# Altium PCB MODULATOR.PcbDoc
Units mm, origin at the board's own origin, x right, y up, seen from the top; angles counter-clockwise.
Board outline 79.6 x 48.2 mm, 2 copper layers (Top Layer, Bottom Layer), stack 1.7 mm thick; 53 components, 27 nets, 145 pads, 189 vias.
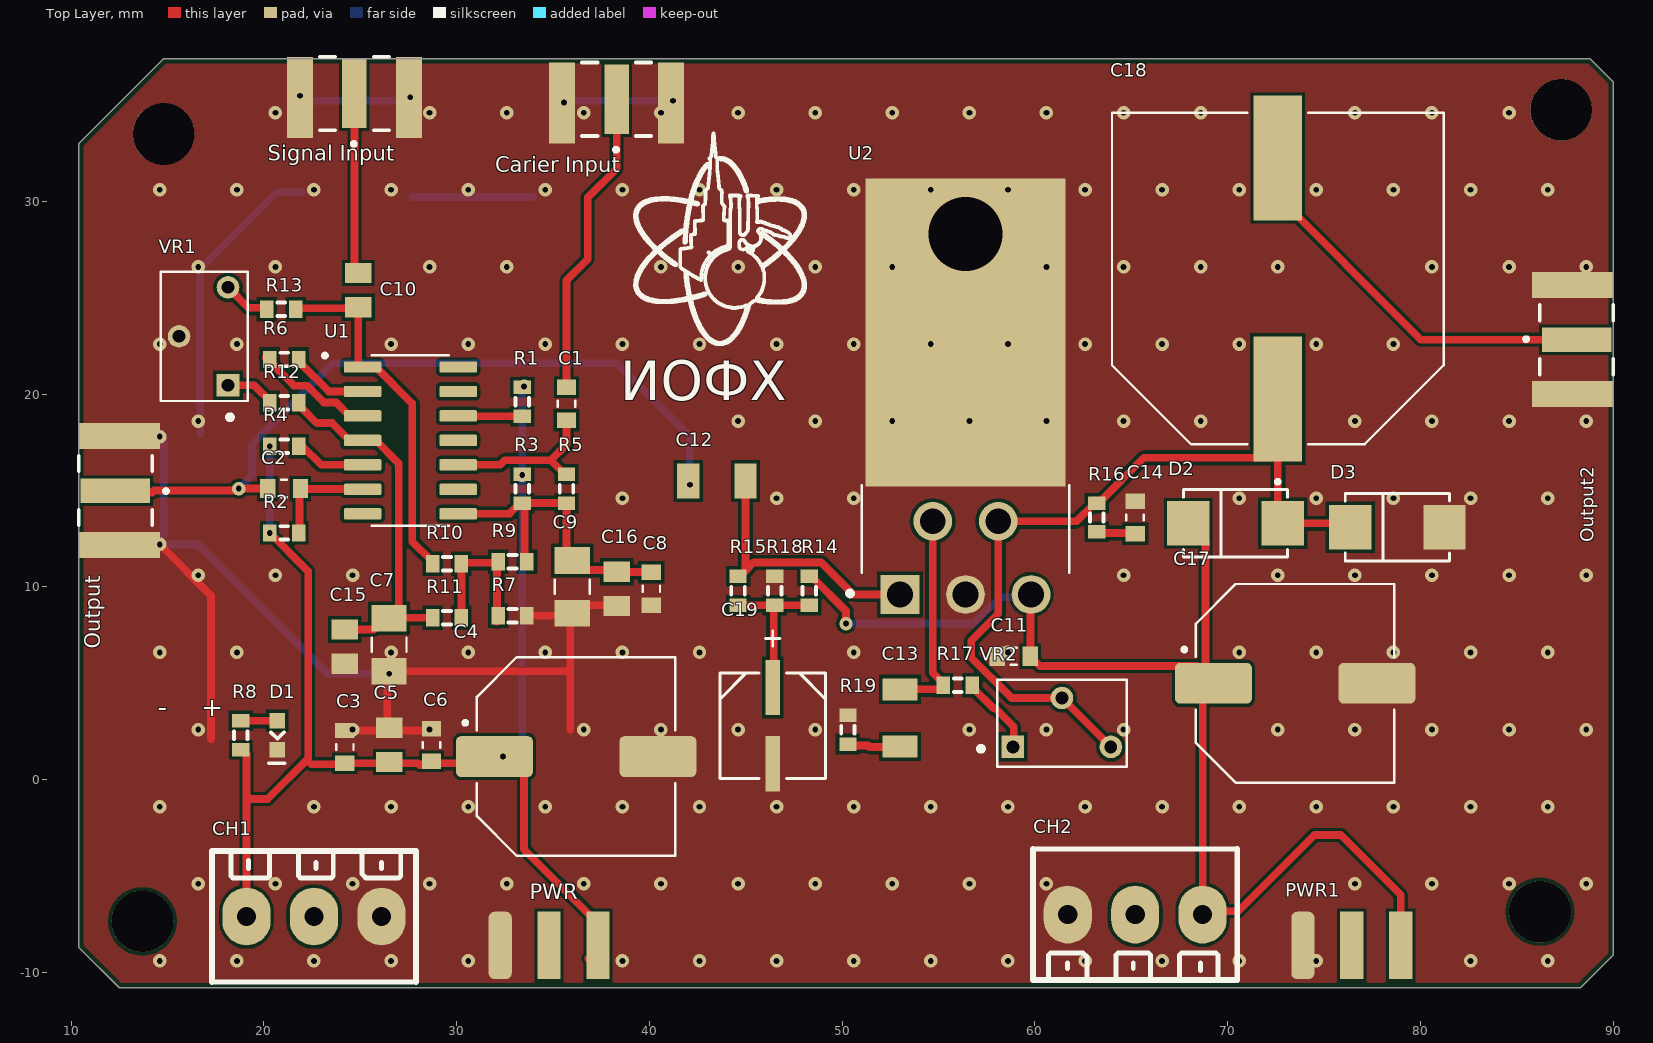
[diagram p0: Top Layer view]
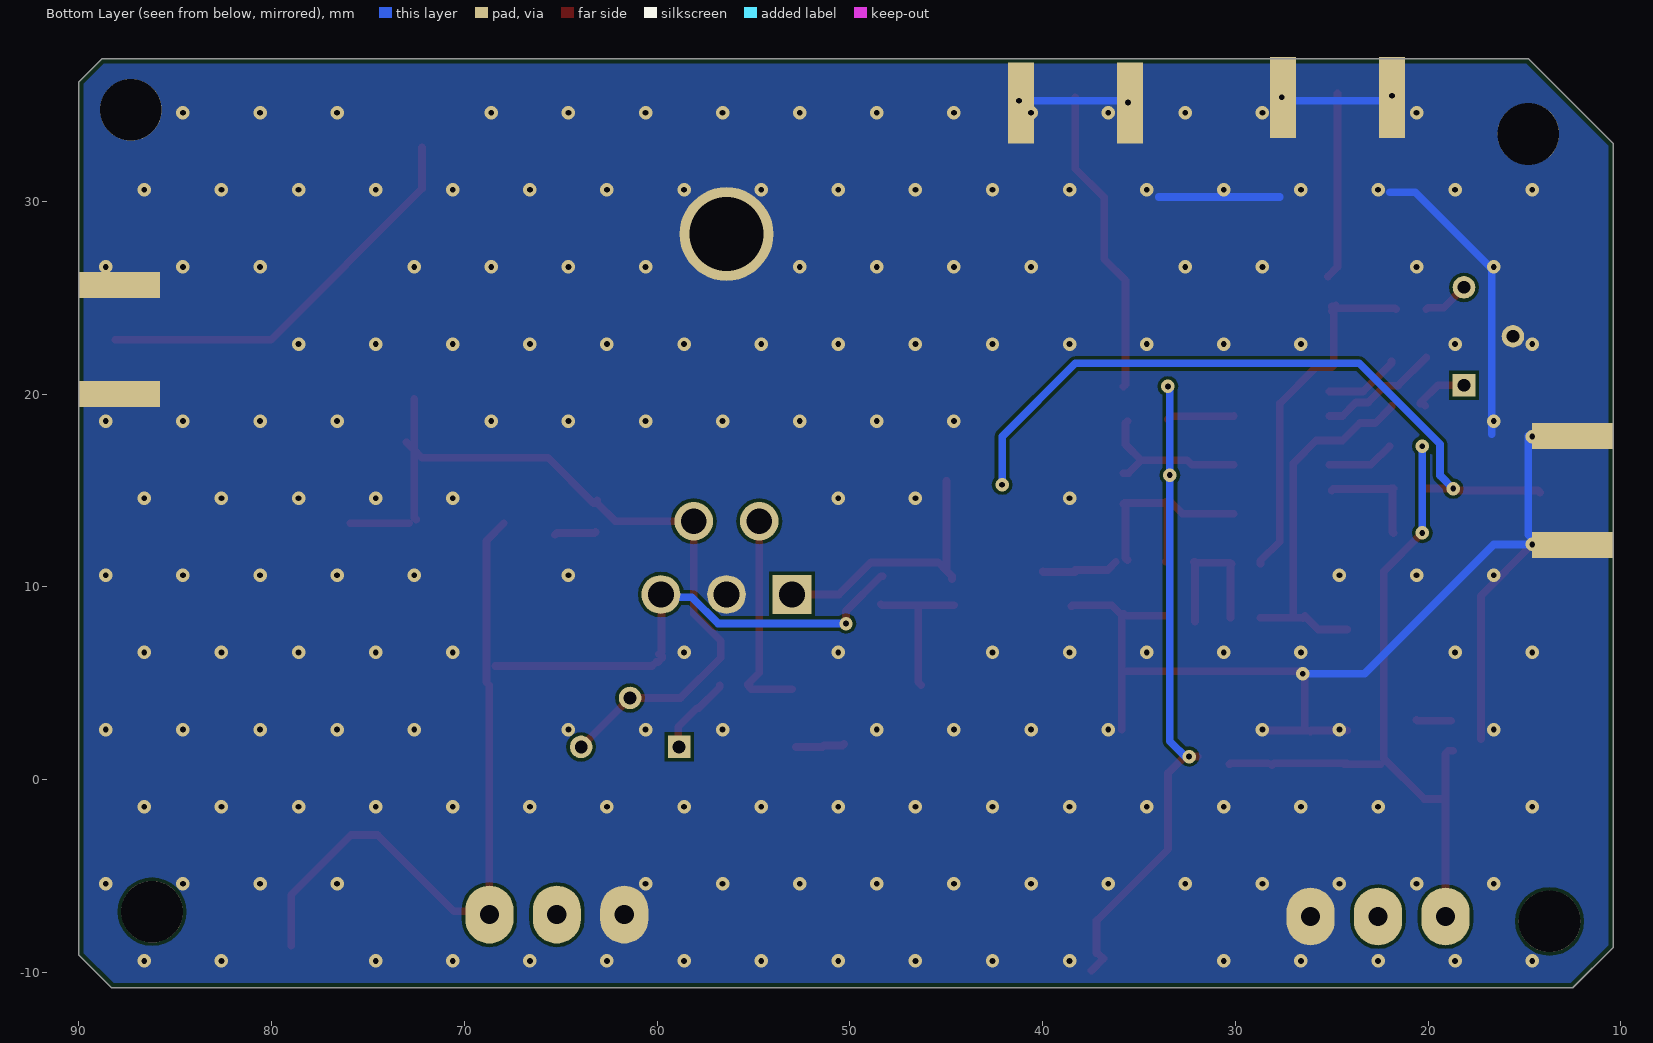
[diagram p1: Bottom Layer view, seen from below]
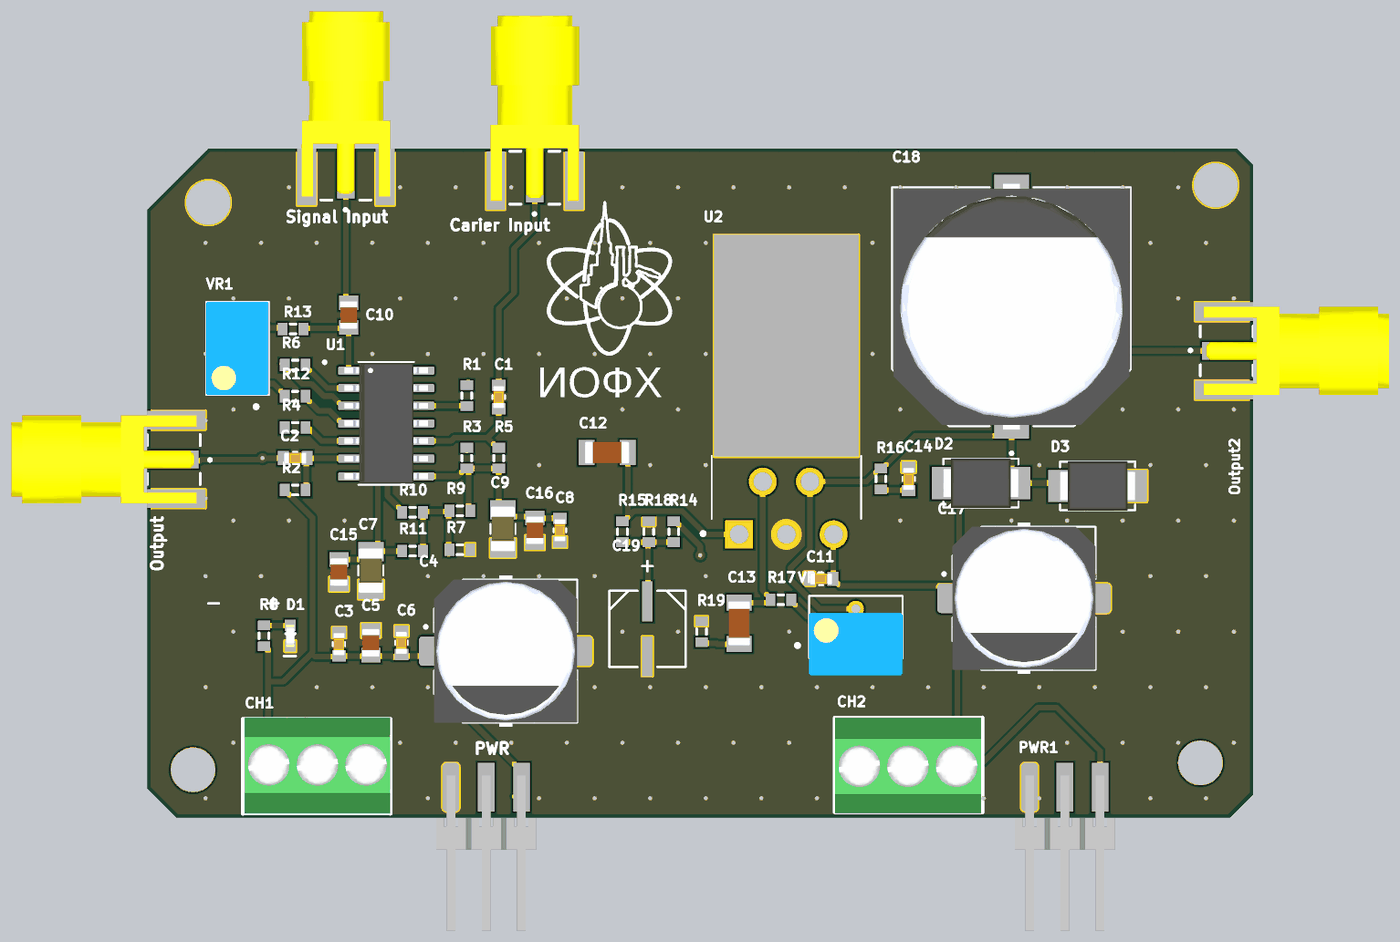
[diagram p2: 3D render of the assembled board from above, using the file's embedded part models]

## Layer stack, top to bottom
Top Solder: solder mask 0.0102, Solder Resist, Dk 3.5
Top Layer: signal copper 0.05
Dielectric 1: dielectric 1.6, FR-4, Dk 4.8
Bottom Layer: signal copper 0.05
Bottom Solder: solder mask 0.0102, Solder Resist, Dk 3.5

## Board outline
10.4,-8.7 12.5,-10.8 88.3,-10.8 90,-9.1 90,36.2 88.8,37.4 14.8,37.4 10.4,33

## Design rules (kind name [scope] priority, off if disabled: settings)
BoardOutlineClearance [All] p1: gap=0.25 ignorepadtopadclearanceinfootprint=FALSE
Clearance [All] p1: gap=0.17 ignorepadtopadclearanceinfootprint=FALSE
ComponentClearance [All] p1: gap=0.254 collisioncheckmode=3 verticalgap=2540 showdistances=FALSE
FanoutControl Fanout_SOIC [IsSOIC] p3: bgadir=Out bgaviamode=Closest fanoutstyle=Auto fanoutdirection=Alternating viagrid=0.025 // Fanout_SOIC (Default Rule)
FanoutControl Fanout_Small [(CompPinCount < 5)] p4: bgadir=Out bgaviamode=Closest fanoutstyle=Auto fanoutdirection=OutThenIn viagrid=0.025 // Fanout_Small (Default Rule)
FanoutControl Fanout_Default [All] p5: bgadir=In bgaviamode=Closest fanoutstyle=Auto fanoutdirection=Alternating viagrid=0.025 // Fanout_Default (Default Rule)
HoleSize [All] p1: absolutevalues=TRUE maxlimit=4.5 minlimit=0.3 maxpercent=80.000 minpercent=20.000
HoleToHoleClearance [All] p1: gap=0.4 allowstackedmicrovias=TRUE
MinimumSolderMaskSliver [All] p1: minsoldermaskwidth=0.15
PlaneClearance [All] p1: clearance=0.2
PlaneConnect [All] p1: planeconnectstyle=Relief reliefexpansion=0.5 reliefentries=4 reliefconductorwidth=0.2 reliefairgap=0.25
PolygonConnect PolygonConnect_1 [InNet('GND')] p1: connectstyle=Direct reliefconductorwidth=0.254 reliefentries=4 polygonreliefangle="90 Angle" airgapwidth=0.254
PolygonConnect [All] p2: connectstyle=Relief reliefconductorwidth=0.3 reliefentries=4 polygonreliefangle="90 Angle" airgapwidth=0.16
RoutingCorners [All] p1: cornerstyle=45-Degree minsetback=2.5 maxsetback=2.5
RoutingPriority [All] p1 off: routingpriority=0
RoutingVias [All] p1: holewidth=0.3 width=0.7 viastyle="Through Hole" minholewidth=0.3 minwidth=0.7 maxholewidth=0.8 maxwidth=1.2
SilkToSilkClearance [All] p1: silktosilkclearance=0
SilkToSolderMaskClearance [IsPad] p1: minsilkscreentomaskgap=0 clearancetoexposedcopper=TRUE
SolderMaskExpansion [All] p1: expansion=0.1 istentingtop=FALSE
Width [All] p1: maxlimit=5 minlimit=0.17 preferedwidth=0.3
17 further rules are at their usual default settings.

## Components (designator, comment, footprint, x,y, rotation, side; value= is the part's Value field where it differs from the comment)
C1 "GX035C104MAT2-500" *CAPC1608X90 35.7,19.5 r270 top value=0.1u
C2 "GX035C104MAT2-500" *CAPC1608X90 21.05,15.1 r180 top value=0.1u
C3 "GX035C104MAT2-500" *CAPC1608X90 24.2,1.7 r90 top value=0.1u
C4 "UWT1H221MNL1GS" CAPAE1030X1080N_UWT1H221MNL1GS 36.2,1.2 r0 top
C5 "GRM21BR61C106KE15K" CAPC2012X135N 26.5,1.8 r270 top value="10u 16V"
C6 "GX035C104MAT2-500" *CAPC1608X90 28.7,1.8 r90 top value=0.1u
C7 "GRM31CR61A476KE15L" *CAPC3216X125N 26.5,7 r90 top value=15u
C8 "GX035C104MAT2-500" *CAPC1608X90 40.1,9.9 r270 top value=0.1u
C9 "GRM31CR61A476KE15L" *CAPC3216X125N 36,10 r90 top value=15u
C10 "GRM21BR61C106KE15K" CAPC2012X135N 24.9,25.4 r270 top value="10u 16V"
C11 "GX035C104MAT2-500" *CAPC1608X90 58.9,6.4 r0 top value=0.1u
C12 "GRM31CR71H225KA88L" *CAP3216X125N 43.5,15.5 r0 top value=2.2u
C13 "GRM31CR71H225KA88L" *CAP3216X125N 53,3.2 r90 top value=2.2u
C14 "GX035C104MAT2-500" *CAPC1608X90 65.2,13.6 r270 top value=0.1u
C15 "GRM21BR61C106KE15K" CAPC2012X135N 24.2,6.9 r90 top value="10u 16V"
C16 "GRM21BR61C106KE15K" CAPC2012X135N 38.3,9.9 r90 top value="10u 16V"
C17 "UWT1H221MNL1GS" CAPAE1030X1080N_UWT1H221MNL1GS 73.5,5 r0 top
C18 "EEE-FK1E272SM" CAP_EEE-FK1E272SM 72.6,26 r90 top
C19 "EEE-FK1E330UR" SM_RADIAL_C 46.4,2.8 r270 top
"Carier Input" "SMA-J-P-H-ST-EM1" SAMTEC_SMA-J-P-H-ST-EM1 38.3,35.3 r180 top
CH1 "LHWR" KF350-3p 16,-1.5 r180 top
CH2 "LHWR" KF350-3p 71.8,-12.6 r0 top
D1 "0603-LED-BLUE" *LEDM1608X80_LTE-C1906R-14(Primary) 20.7,2.3 r90 top
D2 "SK56" *SMB_P6SMB62AT3G(Primary) 70.4,13.3 r180 top
D3 "SK56" *SMB_P6SMB62AT3G(Primary) 78.8,13.1 r180 top
Output "SMA-J-P-H-ST-EM1" SAMTEC_SMA-J-P-H-ST-EM1 12.3,15 r270 top
Output2 "SMA-J-P-H-ST-EM1" SAMTEC_SMA-J-P-H-ST-EM1 88.1,22.825 r90 top
PWR "A" "HDR Side 3 pin" 34.8,-8.6 r0 top
PWR1 "A" "HDR Side 3 pin" 76.44,-8.6 r0 top
R1 "Res3" J1-0603 33.4,19.6 r90 top value=3k
R2 "Res3" J1-0603 21.05,12.8 r180 top value=3k
R3 "Res3" J1-0603 33.4,15.1 r90 top value=1.3k
R4 "RC0603FR-0710KL" J1-0603 21.05,17.3 r0 top value=10k
R5 "Res3" J1-0603 35.7,15.1 r270 top value=51
R6 "Res3" J1-0603 21.05,21.8 r0 top value=1k
R7 "Res3" J1-0603 32.9,8.5 r180 top value=1k
R8 "Res3" J1-0603 18.8,2.3 r90 top value=330
R9 "Res3" J1-0603 32.9,11.3 r0 top value=820
R10 "Res3" J1-0603 29.5,11.2 r180 top value=100
R11 "Res3" J1-0603 29.5,8.4 r180 top value=100
R12 "RC0603FR-0710KL" J1-0603 21.05,19.55 r180 top value=10k
R13 "RC0603FR-0710KL" J1-0603 20.9,24.4 r180 top value=10k
R14 "RC0603FR-0710KL" J1-0603 48.3,9.8 r270 top value=100k
R15 "RC0603FR-0710KL" J1-0603 44.6,9.8 r270 top value=100k
R16 "RC0603FR-0710KL" J1-0603 63.2,13.6 r90 top value=1
R17 "RC0603FR-0710KL" J1-0603 56,4.9 r0 top value=50к
R18 "RC0603FR-0710KL" J1-0603 46.5,9.8 r90 top value=100k
R19 "RC0603FR-0710KL" J1-0603 50.3,2.6 r90 top value=4.7k
"Signal Input" "SMA-J-P-H-ST-EM1" SAMTEC_SMA-J-P-H-ST-EM1 24.7,35.6 r180 top
U1 "MC1496DR2G" SOIC127P600X175-14N 27.6,17.6 r0 top
U2 "TDA2030" TO170P1580X1040X480-5 53,9.607 r0 top
VR1 "3266W-1-503LF" TRIM_3266W-1-503LF 18.14,23 r90 top
VR2 "3266W-1-503LF" TRIM_3266W-1-503LF 61.4,1.7 r0 top

## Footprints (in the part's own frame and the unit in brackets; to place one, negate y for a bottom-side part, rotate by r counter-clockwise, add the part's x,y. Pads: shape width x height; smd on the part's side, far side on the other; paste and mask are expansions set on the pad)
*CAP3216X125N [mm]
  rect 1.15x1.82 smd: 1(-1.485,0) 2(1.485,0)
  body extent -1.6,-0.8 1.6,0.8, height 1.22
*CAPC1608X90 [mm]
  rect 0.8x1 smd: 1(-0.85,0) 2(0.85,0)
  silkscreen extent -0.15,-0.45 0.15,0.45, body extent -0.8,-0.4 0.8,0.41, height 0.88
*CAPC3216X125N [mm]
  rect 1.38x1.82 smd: 1(-1.369,0) 2(1.369,0)
  silkscreen extent -0.36,-0.9 0.36,0.9, body extent -1.6,-0.87 1.6,0.87, height 1.71
*LEDM1608X80_LTE-C1906R-14(Primary) [mm]
  rect 0.8x0.8 smd: A(0.75,0) C(-0.75,0)
  silkscreen extent -1.45,-0.38 0.16,0.45, body extent -0.8,-0.3 0.8,0.3, height 1.15
*SMB_P6SMB62AT3G(Primary) [mm]
  rect 2.2x2.3 smd: A(-2.45,0) C(2.45,0)
  silkscreen extent -2.7,-1.75 2.7,1.75, body extent -2.72,-1.78 2.72,1.78, height 2.49
CAP_EEE-FK1E272SM [mm]
  rect 6.5x2.5 smd: 1(-6.25,0) 2(6.25,0)
  silkscreen extent -10.65,-8.6 8.6,8.6, body extent -8.85,-8.5 8.85,8.5, height 17
CAPAE1030X1080N_UWT1H221MNL1GS [mm]
  rrect25% 3.99x2.12 smd: 1(-4.24,0) 2(4.24,0)
  silkscreen extent -5.85,-5.15 5.15,5.15, body extent -5.15,-5.45 5.15,5.45, height 10.8
CAPC2012X135N [mm]
  rect 1.05x1.38 smd: 1(-0.888,0) 2(0.888,0)
  body extent -1,-0.63 1,0.63, height 1.35
"HDR Side 3 pin" [mm]
  rrect50% 1.2x3.5 smd: 1(-2.54,0)
  rect 1.2x3.5 smd: 2(0,0) 3(2.54,0)
  body extent -3.61,-10.34 3.61,0.83, height 1.67
J1-0603 [mm] "Chip Resistor, Body 1.6x0.8mm, IPC High Density"
  rect 0.7x0.9 smd: 1(-0.75,0) 2(0.75,0)
  silkscreen extent -0.2,-0.35 0.2,0.35, body extent -0.85,-0.48 0.85,0.48, height 0.9
KF350-3p [mm] "-"
  oval 2.5x3 hole 1: 1(-10.1,5.6) 2(-6.6,5.6) 3(-3.1,5.6)
  silkscreen extent -11.9,2.2 -1.3,9, body extent -11.9,2.1 -1.4,9, height 8.8
SAMTEC_SMA-J-P-H-ST-EM1 [mm]
  rect 1.27x3.6 smd: 1(0,0)
  rect 1.35x4.2 smd: 2_1(-2.825,0.2) 3_1(2.825,0.2)
  rect 1.35x4.2 smd far side: 2_2(-2.825,0.2) 3_2(2.825,0.2)
  silkscreen extent -1.8,-1.9 1.8,2.72, body extent -3.17,-11.66 3.18,1.67, height 3.67
SM_RADIAL_C [mil]
  rect 113x30 smd: 1(-78,0) 2(78,0)
  silkscreen extent -193,-108 108,108
SOIC127P600X175-14N [mm]
  rrect25% 1.95x0.59 smd: 1(-2.48,3.81) 2(-2.48,2.54) 3(-2.48,1.27) 4(-2.48,0) 5(-2.48,-1.27) 6(-2.48,-2.54) 7(-2.48,-3.81) 8(2.48,-3.81) 9(2.48,-2.54) 10(2.48,-1.27) 11(2.48,0) 12(2.48,1.27) 13(2.48,2.54) 14(2.48,3.81)
  silkscreen extent -4.53,-4.43 2,4.5, body extent -3,-4.33 3,4.32, height 1.75
TO170P1580X1040X480-5 [mm]
  rect 2.01x2.01 hole 1.34: 1(0,0)
  round 2.01 hole 1.34: 2(1.7,3.8) 3(3.4,0) 4(5.1,3.8) 5(6.8,0)
  rect 10.4x15.99 smd: 6(3.4,13.593)
  round 4.866 hole 3.85: 6.1(3.4,18.7)
  silkscreen extent -2.69,-0.05 8.78,5.66
TRIM_3266W-1-503LF [mm]
  rect 1.168x1.168 hole 0.66: 1(-2.54,0)
  round 1.168 hole 0.66: 2(0,2.54) 3(2.54,0)
  silkscreen extent -4.3,-1.02 3.35,3.48, body extent -3.35,-1 3.36,3.5, height 9.64

## Part data
C1 C2 C3 C6 C8 C11 C14: "Cap Thin Film 0.1uf 50v 0603", Package="0603 AVX", MF=AVX, Pacage Metric=1608, SnapEDA_Link=https://www.snapeda.com/parts/GX035C104MAT2-500/AVX/view-part/?ref=snap, Type=SMD
  C1 C2 C8 C11 C14: MP=GX035C104MAT2-500
  C3 C6: MP="GX035C104MAT2-500 or CL10B104JB8NNNC"
C4 C17: "220ВµF 50V Aluminum Electrolytic Capacitors Radial, Can - SMD 5000 Hrs @ 105В°C", Package=None, Availability=Unavailable, MF="{'manufacturer': u'Nichicon'}", MP=UWT1H221MNL1GS, Price=None
C5 C10 C15 C16 C19 U1: Package=None, Availability=Unavailable, Price=None
  C5 C10 C15 C16: MF="{'manufacturer': u'Murata'}", MP=GRM21BR61C106KE15K
  C19: MF="{'manufacturer': u'Panasonic Electronic'}", MP=EEE-FK1E330UR
  U1: MF="{'manufacturer': u'ON Semiconductor'}", MP=MC1496DR2G
C7 C9: "Multilayer Ceramic Capacitor, GRM Series, 47 - F, - 10%, X5R, 10 V, 1206 [3216 Metric]", Package="1206 Murata Electronics", MF="Murata Electronics", MP=GRM31CR61A476KE15L, SnapEDA_Link=https://www.snapeda.com/parts/GRM31CR61A476KE15L/Murata%20Electronics%20North%20America/view-part/?ref=snap, Type=SMD
C12 C13: "1206 2.2 uF 50 V В±10% Tolerance X7R SMT Multilayer Ceramic Capacitor", Package="1206 Murata", MF="Murata Electronics", MP=GRM31CR71H225KA88L, SnapEDA_Link=https://www.snapeda.com/parts/GRM31CR71H225KA88L/Murata%20Electronics%20North%20America/view-part/?ref=snap, Type=SMD
C18: "CAP ALUM 2700UF 20% 25V SMD", Package=None, Availability=Unavailable, MF="{'manufacturer': u'Panasonic Electronic Components'}", MP=EEE-FK1E272SM, Price=None
"Carier Input" Output Output2 "Signal Input": "SMA Connector Jack, Female Socket 50Ohm Board Edge, End Launch Solder", Package=None, Digi-Key_Part_Number=SAM8857-ND, MF=Samtec, MP=SMA-J-P-H-ST-EM1, SnapEDA_Link=https://www.snapeda.com/parts/SMA-J-P-H-ST-EM1/Samtec%20Inc./view-part/134500/?ref=snap, Toby_UK-Purchase-URL=https://snapeda.com/shop?store=Toby+UK&id=134500
CH1 CH2: library part "Connector 3Pin", Designer="Hamed Jafarzadeh - www.R2T.ir", System=Connector
D1: library part LTE-C1906R-14, "LED IrLED Chip LED 2-Pin SMD T/R", Package="0603 Lite-On", MP=0603-LED-BLUE, SnapEDA_Link=https://www.snapeda.com/parts/LTE-C1906R-14/Lite-On%20Inc./view-part/?ref=snap, Type=SMD
D2 D3: "Диод Шоттки 5А 60В [SMB / DO-214AA]", Package="DO-214 Littelfuse", ChipDip_Link=https://www.chipdip.ru/product/sk56, MF="Littelfuse Inc.", MP=SK56, SnapEDA_Link=https://www.snapeda.com/parts/P6SMB62AT3G/Littelfuse%20Inc./view-part/?ref=snap, Type=SMD
PWR PWR1: library part "Header 3", "Header, 4-Pin", ChipDip_Link=https://www.chipdip.ru/product/pls-3, HelpURL=https://static.chipdip.ru/lib/227/DOC000227157.pdf, MF="Connfly electronic (Zhenqin)", MP="PLS-3 (DS1021-1x3)", System=Connector, Type=SMD
R1 R2 R3 R5 R6 R7 R8 R9 R10 R11: "Resistor", Package=R0603, ChipDip_Link=https://www.chipdip.ru/product0/9000079628, HelpURL=https://www.chipdip.ru/product0/9000079628, MP=RC0603FR-07330RL, Pacage Metric=1608, Type=SMD
R4 R12 R13 R14 R15 R16 R17 R18 R19: "10 kOhms 1 0.1 W 1 10 W Chip Resistor 0603 1608 Metric Thick Film", Package=R0603, ChipDip_Link=https://www.chipdip.ru/product0/9000079736, HelpURL=https://www.chipdip.ru/product0/9000079736, MF="Yageo or NXP", MP="10K 1% 0603", Pacage Metric=1608, SnapEDA_Link=https://www.snapeda.com/parts/RC0603FR-0710KL/Yageo/view-part/?ref=dk&t=RC0603FR-0710KL&con_ref=None, Type=SMD
U2: "14 W hi-fi audio amplifier", Package=None, Availability=Unavailable, MF="{'manufacturer': u'STMicroelectronics'}", MP=TDA2030, Price=None
VR1 VR2: "Res Cermet Trimmer 1K Ohm 10% 1/4W 12(Elec)Turn 1.78mm (6.71 X 4.5 X 8.26mm) Pin Thru-Hole Tube", Package=None, Availability=Unavailable, MF="{'manufacturer': u'Bourns'}", MP=3266W-1-503LF, Price=None

## Free pads (board coordinates)
  round 3.2 hole 3.2: ""(13.7,-7.35) ""(14.8,33.5) ""(86.2,-6.85) ""(87.3,34.75)

## Via types
v1: diameter 0.7, hole 0.3, Top Layer to Bottom Layer, tented both sides, 189 vias

## Nets (pads, with @x,y where several pads share a name; then routed paths per layer and width w, separated by ;. In a path a pad name is that pad's centre, name@x,y a point inside that pad or via, vN(x,y) a via of type N, cw(c..) or ccw(c..) an arc to the next point about the centre after c; other vN are vias at no path point)
12V: C3.1 C4.1 C5.2 C6.1 CH1.3 PWR.3 R1.2 R2.2 R3.2 R4.1 R8.1 | length 71.6
  Top Layer w0.4: R8.1@18.7,1.5 18.95,1.5 19.1,1.35 CH1.3 ; 19.2,-1 20.2,-1 22.3,1.1 22.3,10.8 v1(20.3,12.8) ; 22.46,0.8 C3.1@24.36,0.8 ; C3.1 28,0.85 28.1,0.75 ; C6.1@28.3,0.85 30.25,0.85 C4.1@30.3,0.8 ; C4.1 v1(32.4,1.2) 32.635,1.2 33.49,0.345 33.49,-3.6 37.2,-7.31 PWR.3@37.2,-8.96 ; PWR.3@36.84,-9.28 PWR.3@36.86,-9.3 ; PWR.3@37.2,-9 PWR.3@37.2,-8.96 ; PWR.3@37.46,-9.9 PWR.3@36.86,-9.3 ; PWR.3@36.86,-9.3 PWR.3@37.2,-8.96
  Bottom Layer w0.4: v1(20.3,12.8) v1(20.3,17.3) ; v1@32.5,1.1 33.4,2 v1(33.4,15.8) 33.4,20.3 v1(33.5,20.4)
24V: C11.2 C17.1 CH2.3 D2.C PWR1.3 R14.1 U2.5 | length 61.9
  Top Layer w0.4: R14.1 48.4,10.55 50.2,8.75 v1(50.2,8.1) ; C11.2 59.75,6.3 59.95,6.1 60.05,6.1 60.25,5.9 C17.1@68.4,5.9 ; U2.5 59.775,9.582 59.775,6.625 C11.2@59.9,6.5 ; D2.C 68.85,12.4 68.85,5.05 68.7,4.9 68.7,-6.5 69.025,-6.825 70.55,-6.825 74.509,-2.866 75.866,-2.866 78.98,-5.98 PWR1.3
  Bottom Layer w0.4: v1(50.2,8.1) 56.838,8.1 58.195,9.457 59.757,9.457 U2.5@59.9,9.6
"Carier Input": "Carier Input.1" C1.1 | length 16.1
  Top Layer w0.4: C1.1@35.8,20.4 35.7,20.5 35.7,25.9 36.8,27 36.8,30.2 38.3,31.7 38.3,35.3 38.3,35.4
CIN: C1.2 R5.1 U1.10 | length 8.5
  Top Layer w0.4: U1.10 32.262,16.33 32.502,16.57 34.88,16.57 ; C1.2@35.6,18.6 35.7,18.5 35.7,17.39 34.88,16.57 ; R5.1@35.8,15.9 35.55,15.9 34.88,16.57
GND: "Carier Input.2_1" "Carier Input.2_2" "Carier Input.3_1" "Carier Input.3_2" "Signal Input.2_1" "Signal Input.2_2" "Signal Input.3_1" "Signal Input.3_2" C3.2 C4.2 C5.1 C6.2 C7.1 C8.2 C9.1 C11.1 C14.1 C15.1 C16.1 C17.2 C19.2 CH1.1 CH2.1 D1.C D3.A Output2.2_1 Output2.2_2 Output2.3_1 Output2.3_2 Output.2_1 Output.2_2 Output.3_1 Output.3_2 pad.@14.8,33.5 pad.@87.3,34.75 PWR1.1 PWR.1 R7.1 R18.2 R19.2 U2.3 U2.6 U2.6.1 VR1.2 | length 93.1
  Top Layer w0.4: v1@14.7,12.3 14.7,12.175 14.7,12.1 17.26,9.54 17.26,2.1 ; v1@21.875,35.4 v1(21.875,35.475) ; C3.2 26.05,2.55 C5.1@26.1,2.5 ; C7.1@26.4,5.5 26.4,2.7 26.25,2.55 28.3,2.55 28.35,2.55 C6.2@28.4,2.5 ; C7.1 35.869,5.631 35.9,5.6 ; C6.2@28.5,2.7 28.5,2.65 C6.2@28.6,2.55 ; R7.1 35.7,8.5 C9.1@35.8,8.6 ; v1(35.575,35.125) v1@35.575,35.3 ; 35.9,2.6 35.9,5.6 ; C9.1@35.9,8.6 35.9,5.6 ; C9.1 36.419,9.05 38.45,9.05 C16.1@38.5,9 ; v1(41.225,35.225) v1@41.225,35.3
  Bottom Layer w0.4: Output.3_2@14.2,12.1 14.8,12.7 v1@14.8,17.825 ; Output.3_2@14.5,12.2 v1(14.6,12.2) 16.6,12.2 23.3,5.5 v1(26.5,5.5) ; 16.7,17.925 16.7,26.5 20.675,30.475 21.975,30.475 ; v1@21.875,35.225 v1@27.6,35.225 ; v1(27.6,35.4) v1@27.7,35.3 ; 27.7,30.225 33.975,30.225 ; v1@35.775,35.225 v1(41.225,35.225) v1@41.2,35.2
  other v1: 14.6,-9.4 18.6,-9.4 22.6,-9.4 26.6,-9.4 30.6,-9.4 38.6,-9.4 42.6,-9.4 46.6,-9.4 50.6,-9.4 54.6,-9.4 58.6,-9.4 62.6,-9.4 66.6,-9.4 70.6,-9.4 74.6,-9.4 82.6,-9.4 86.6,-9.4 16.6,-5.4 20.6,-5.4 24.6,-5.4 28.6,-5.4 32.6,-5.4 36.6,-5.4 40.6,-5.4 44.6,-5.4 48.6,-5.4 52.6,-5.4 56.6,-5.4 60.6,-5.4 76.6,-5.4 80.6,-5.4 84.6,-5.4 88.6,-5.4 14.6,-1.4 22.6,-1.4 26.6,-1.4 30.6,-1.4 34.6,-1.4 38.6,-1.4 42.6,-1.4 46.6,-1.4 50.6,-1.4 54.6,-1.4 58.6,-1.4 62.6,-1.4 66.6,-1.4 70.6,-1.4 74.6,-1.4 78.6,-1.4 82.6,-1.4 86.6,-1.4 16.6,2.6 24.6,2.6 28.6,2.6 36.6,2.6 40.6,2.6 44.6,2.6 48.6,2.6 56.6,2.6 60.6,2.6 64.6,2.6 72.6,2.6 76.6,2.6 80.6,2.6 84.6,2.6 88.6,2.6 14.6,6.6 18.6,6.6 26.6,6.6 30.6,6.6 34.6,6.6 38.6,6.6 42.6,6.6 50.6,6.6 58.6,6.6 70.6,6.6 74.6,6.6 78.6,6.6 82.6,6.6 86.6,6.6 16.6,10.6 20.6,10.6 24.6,10.6 64.6,10.6 72.6,10.6 76.6,10.6 80.6,10.6 84.6,10.6 88.6,10.6 38.6,14.6 46.6,14.6 50.6,14.6 70.6,14.6 74.6,14.6 78.6,14.6 82.6,14.6 86.6,14.6 14.6,17.8 16.6,18.6 44.6,18.6 48.6,18.6 52.6,18.6 56.6,18.6 60.6,18.6 64.6,18.6 68.6,18.6 76.6,18.6 80.6,18.6 84.6,18.6 88.6,18.6 14.6,22.6 18.6,22.6 26.6,22.6 30.6,22.6 34.6,22.6 38.6,22.6 42.6,22.6 46.6,22.6 50.6,22.6 54.6,22.6 58.6,22.6 62.6,22.6 66.6,22.6 70.6,22.6 74.6,22.6 78.6,22.6 16.6,26.6 20.6,26.6 28.6,26.6 32.6,26.6 40.6,26.6 44.6,26.6 48.6,26.6 52.6,26.6 60.6,26.6 64.6,26.6 68.6,26.6 72.6,26.6 80.6,26.6 84.6,26.6 88.6,26.6 14.6,30.6 18.6,30.6 22.6,30.6 26.6,30.6 30.6,30.6 34.6,30.6 38.6,30.6 42.6,30.6 46.6,30.6 50.6,30.6 54.6,30.6 58.6,30.6 62.6,30.6 66.6,30.6 70.6,30.6 74.6,30.6 78.6,30.6 82.6,30.6 86.6,30.6 20.6,34.6 28.6,34.6 32.6,34.6 36.6,34.6 40.6,34.6 44.6,34.6 48.6,34.6 52.6,34.6 56.6,34.6 60.6,34.6 64.6,34.6 68.6,34.6 76.6,34.6 80.6,34.6 84.6,34.6
Input: "Signal Input.1" C10.1 | length 9.7
  Top Layer w0.4: 24.7,35.6 24.7,26.6 C10.1@25.2,26.1
NetC2_1: C2.1 R2.1 U1.6 | length 5.5
  Top Layer w0.4: R2.1 21.85,12.85 21.85,15.05 C2.1@21.8,15.1 ; C2.1 21.92,15.08 24.92,15.08 U1.6@25,15
NetC7_2: C7.2 C15.2 R11.2 R12.1 U1.4 | length 19.1
  Top Layer w0.4: R12.1@21.9,19.4 21.9,19.35 22.752,18.497 23.543,18.497 24.44,17.6 U1.4 25.8,17.6 27,16.4 27,8.5 C7.2@26.9,8.4 ; C15.2 25.699,7.788 26.4,8.489 C7.2@26.4,8.5 ; C7.2 26.531,8.4 R11.2@28.7,8.4
NetC8_1: C8.1 C9.2 C16.2 R3.1 R5.2 R9.2 U1.8 | length 16.3
  Top Layer w0.4: U1.8 32.74,13.79 33.35,14.4 R3.1@33.6,14.4 ; R9.2@33.6,11.3 33.525,11.375 33.525,14.225 R3.1 35.75,14.35 R5.2@35.8,14.3 ; C9.2@35.6,11.4 35.7,11.5 R5.2 ; C9.2@36.2,11.3 36.621,10.879 C16.2@38.3,10.879 ; C16.2 38.319,10.769 39.969,10.769 C8.1@40,10.8
NetC10_2: C10.2 R10.2 R13.1 U1.1 | length 18.6
  Top Layer w0.4: R13.1 21.706,24.456 24.656,24.456 C10.2@24.8,24.6 ; C10.2@24.9,24.45 C10.2@25,24.55 ; C10.2@25,24.3 24.95,24.3 24.9,24.25 24.9,21.505 24.995,21.41 U1.1 25.8,21.41 27.7,19.51 27.7,12.35 28.7,11.35 R10.2@28.7,11.2
NetC12_2: C12.2 R15.1 U2.1 | length 14.1
  Top Layer w0.4: R15.1@44.7,10.4 44.7,10.55 R15.1@44.985,10.835 ; C12.2 R15.1@44.985,10.835 ; U2.1 50.566,9.607 48.903,11.27 45.42,11.27 R15.1@44.985,10.835
NetC13_1: C13.1 R19.1 | length 2.6
  Top Layer w0.4: R19.1 50.38,1.77 51.35,1.77 51.42,1.7 C13.1@52.8,1.7
NetC13_2: C13.2 R17.1 U2.2 | length 11.1
  Top Layer w0.4: C13.2 55.1,4.685 55.2,4.785 R17.1@55.2,4.9 ; U2.2 54.7,5.55 55.3,4.95 R17.1@55.3,4.9
NetC14_2: C14.2 R16.1 | length 2.2
  Top Layer w0.4: R16.1 63.25,12.8 65.2,12.8 C14.2@65.3,12.7
NetC18_2: C18.2 Output2.1 | length 21.3
  Top Layer w0.4: C18.2@72.2,32.8 72.2,30.65 80.025,22.825 Output2.1
NetC19_1: C19.1 R14.2 R15.2 R18.1 | length 8.1
  Top Layer w0.4: R15.2 R18.1 ; C19.1@46.3,4.9 46.45,5.05 46.45,9 R18.1 ; R14.2@48.4,9.1 48.35,9.05 R14.2 R18.1
NetD1_A: D1.A R8.2 | length 1.8
  Top Layer w0.4: R8.2 20.55,3.05 D1.A@20.6,3.1
NetR1_1: R1.1 U1.12 | length 3.5
  Top Layer w0.4: U1.12 30.09,18.86 33.34,18.86 R1.1@33.5,18.7
NetR4_2: R4.2 U1.5 | length 3.5
  Top Layer w0.4: R4.2@22,17.3 22.97,16.33 U1.5
NetR6_1: R6.1 U1.3 | length 6.3
  Top Layer w0.4: R6.1@20.1,21.9 21.567,20.433 22.241,20.433 23.103,19.57 23.74,19.57 24.44,18.87 U1.3
NetR6_2: R6.2 U1.2 | length 3.9
  Top Layer w0.4: R6.2@21.9,21.7 21.9,21.6 23.36,20.14 U1.2
NetR7_2: R7.2 R9.1 R10.1 R11.1 | length 7.8
  Top Layer w0.4: R10.1@30.2,11.2 30.25,11.15 R11.1 ; R10.1 30.3,11.25 32.05,11.25 R9.1@32.1,11.3 ; R7.2@32.1,8.2 32.1,11.25 R9.1
NetR12_2: R12.2 VR1.1 | length 2.9
  Top Layer w0.4: VR1.1 19.49,20.46 20.4,19.55 R12.2@20.4,19.5 ; R12.2@20.15,19.4 R12.2
NetR13_2: R13.2 VR1.3 | length 2.4
  Top Layer w0.4: VR1.3 19.2,24.48 20.02,24.48 R13.2@20.1,24.4
NetR17_2: R17.2 VR2.1 | length 4.1
  Top Layer w0.4: R17.2 56.75,4.8 57.85,3.7 57.95,3.7 58.9,2.75 VR2.1@58.9,1.7
Output: C2.2 C12.1 Output.1 | length 37.1
  Top Layer w0.4: 14.2,14.9 14.3,15 ; 14.4,15 18.6,15 v1(18.7,15.1) C2.2
  Bottom Layer w0.4: v1(18.7,15.1) 19.38,15.78 19.38,17.398 23.582,21.6 38.3,21.6 42.1,17.8 v1(42.1,15.3)
Output2: C18.1 D2.A D3.C R16.2 U2.4 VR2.2 VR2.3 | length 42.9
  Top Layer w0.4: U2.4@57.9,13.4 58.1,13.2 58.1,8.6 56.7,7.2 56.7,6.327 58.787,4.24 VR2.2 63.9,1.74 VR2.3@63.9,1.7 ; U2.4 62.157,13.407 63.1,14.35 R16.2@63.1,14.5 ; R16.2 63.3,14.35 65.65,16.7 72.2,16.7 C18.1@72.6,17.1 ; D2.A@72.5,13.5 72.6,13.6 C18.1@72.6,17.1 ; C18.1 C18.1@72.6,17.1 ; D2.A D3.C@75.9,13.3 ; C18.1@73,17.5 C18.1@72.6,17.1
pads on no net: CH1.2 CH2.2 PWR1.2 PWR.2 U1.7 U1.9 U1.11 U1.13 U1.14

## Polygon pours and split planes (outlines as drawn)
GND on Bottom Layer "GND_L02_P016" (solid, remove dead copper, pour order 16): 95.1,39.817 95.1,-23.8 5.4,-23.8 5.4,39.468
GND on Top Layer "GND_L01_P014" (solid, remove dead copper, pour order 14): 93.9,40.4 93.9,-17.864 7.565,-14.767 4.15,41.85

## Silkscreen, mask and mechanical layers (free items; w line width, h text height)
Top Overlay:
  drawing of 3126 lines, arcs and shapes, not listed
  text "ИОФХ" at 38.5,19 h3.5
  text "-    +" at 14.5,3.3 h1
Mechanical 2:
  the board outline again, w0.4

## Text inside footprints (layer, text, board x,y; h text height)
"Carier Input": Mechanical 13 "PCB EDGE" at 33.996,37.002 h0.61 r180
Output: Mechanical 13 "PCB EDGE" at 10.598,10.696 h0.61 r270
Output2: Mechanical 13 "PCB EDGE" at 89.802,27.129 h0.61 r90
"Signal Input": Mechanical 13 "PCB EDGE" at 20.396,37.302 h0.61 r180